# Altium PCB simple_bezel.PcbDoc
Units mm, origin at the board's own origin, x right, y up, seen from the top; angles counter-clockwise.
Board outline 100 x 100 mm, 2 copper layers (Top Layer, Bottom Layer); 5 components, 1 nets, 4 pads, 0 vias.
Unrouted connection lines stored in the file: 31.
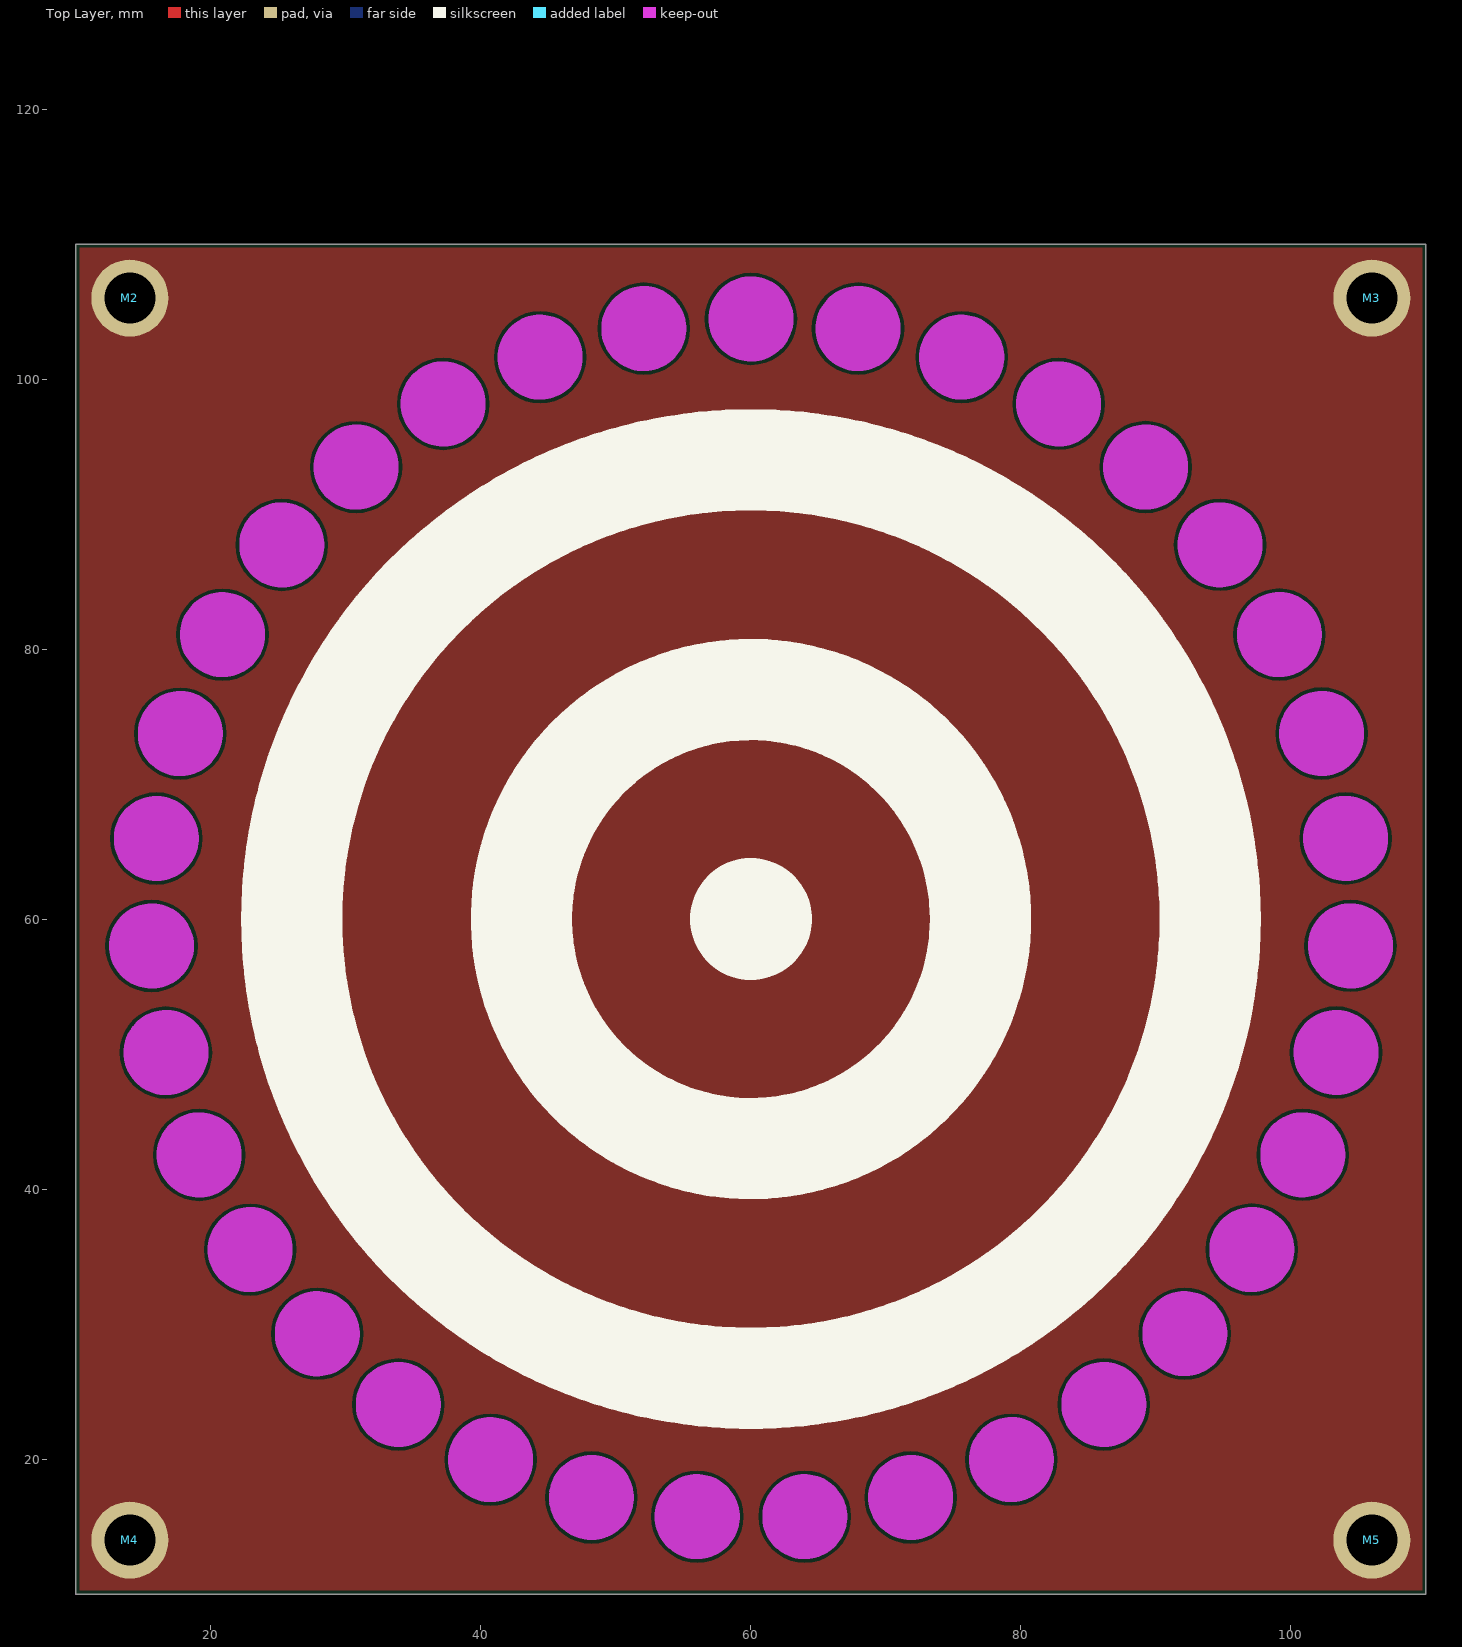
[diagram p0: Top Layer view]
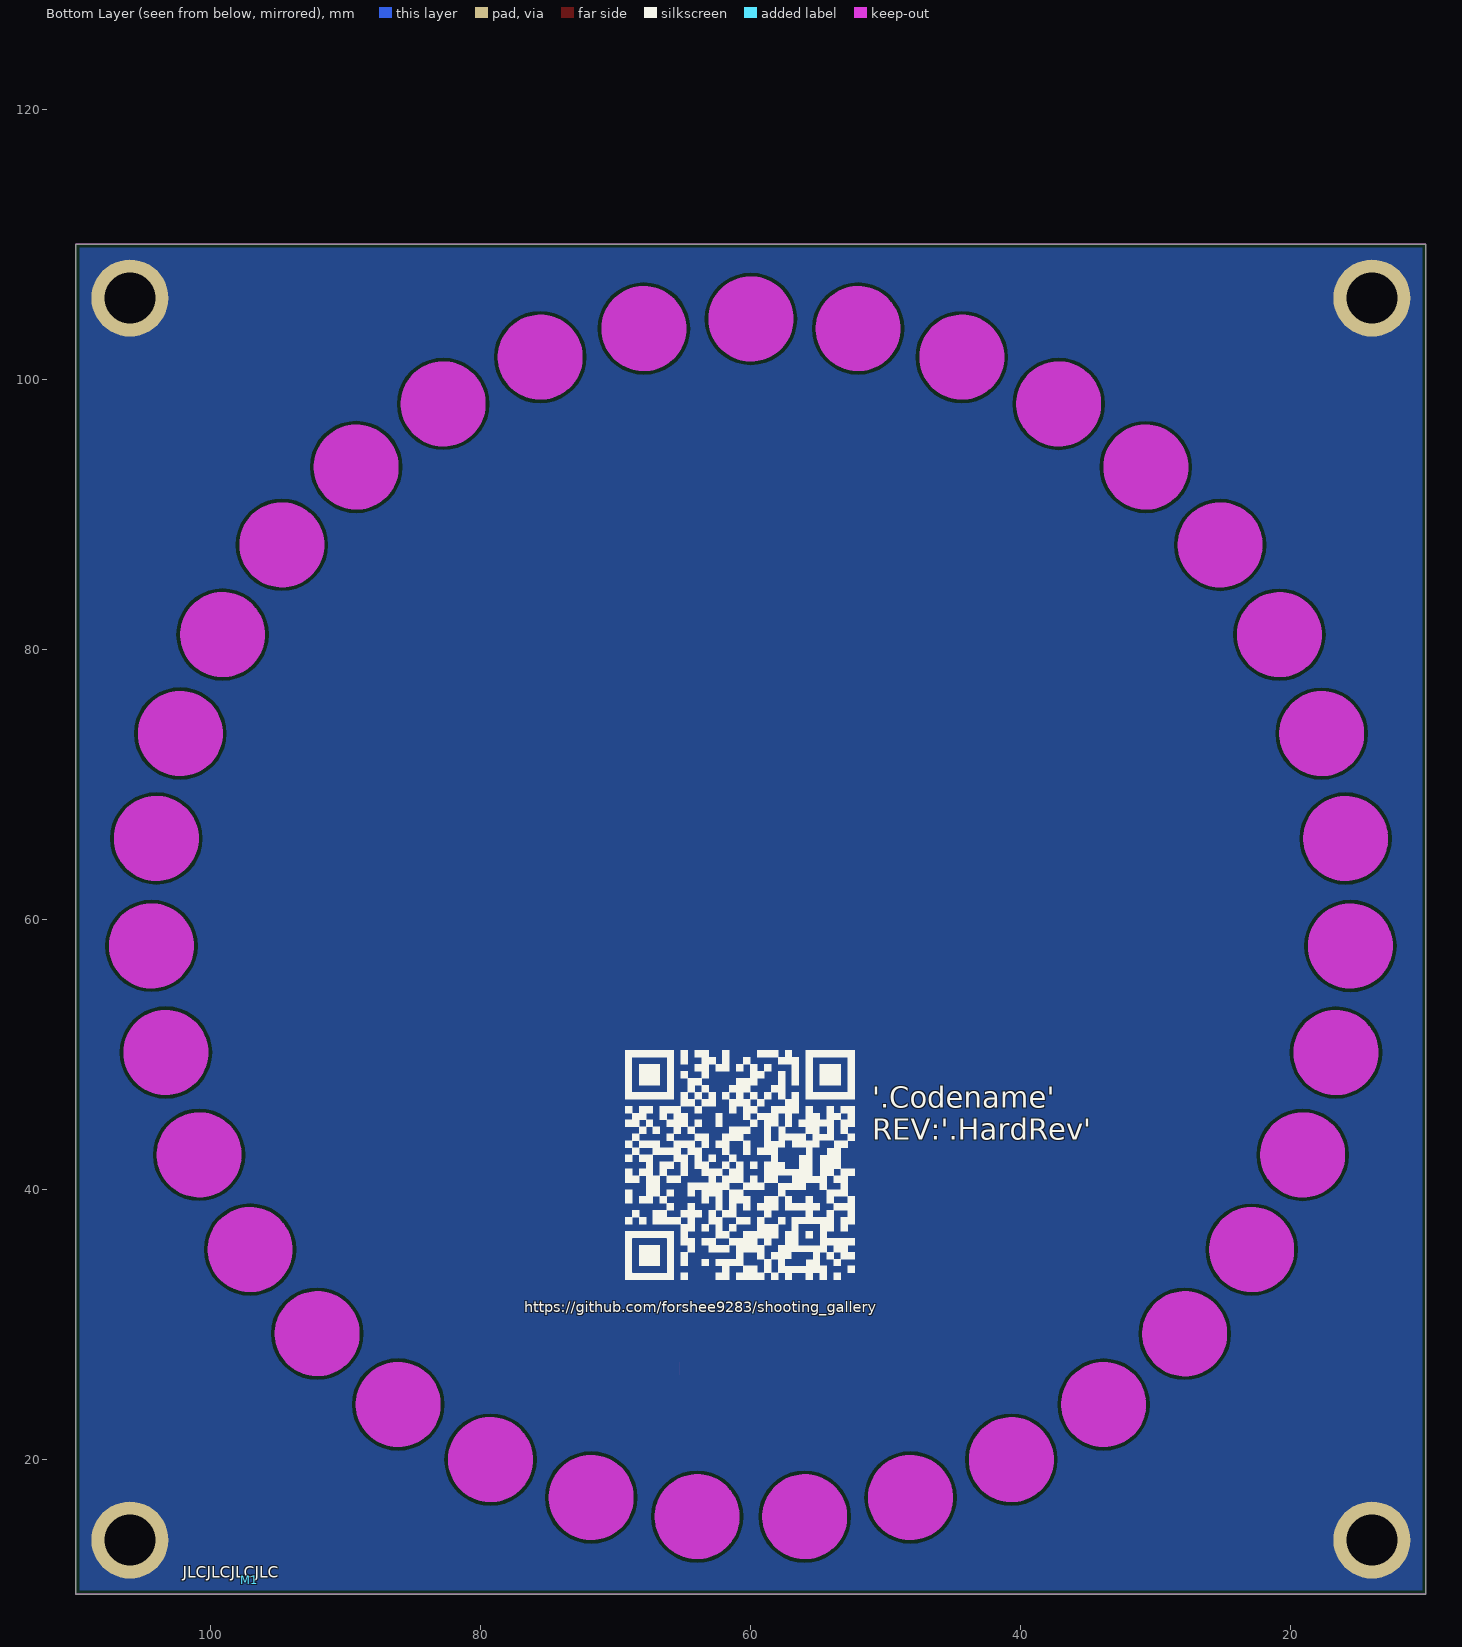
[diagram p1: Bottom Layer view, seen from below]

## Layer stack, top to bottom
Top Solder: solder mask 0.0102, Solder Resist, Dk 3.5
Top Layer: signal copper 0.0356
Dielectric 1: dielectric 0.32, FR-4, Dk 4.8
Bottom Layer: signal copper 0.0356
Bottom Solder: solder mask 0.0102, Solder Resist, Dk 3.5

## Board outline
10,10 110,10 110,110 10,110

## Design rules (kind name [scope] priority, off if disabled: settings)
Clearance Clearance_Poly_Keepout [InPolygon vs IsKeepOut] p1: gap=0.254 ignorepadtopadclearanceinfootprint=FALSE
Clearance Clearance_Poly [InPolygon] p2: gap=0.635 ignorepadtopadclearanceinfootprint=FALSE
Clearance [All] p3: gap=0.254 ignorepadtopadclearanceinfootprint=FALSE
HoleSize [All] p1: absolutevalues=TRUE maxlimit=2539.975 minlimit=0.025 maxpercent=80.000 minpercent=20.000
MinimumSolderMaskSliver [All] p1: minsoldermaskwidth=0.051
PolygonConnect PolygonConnect_Mount [IsPad and (InComponent('M2') or InComponent('M3') or InComponent('M4') or InComponent('M5'))] p1: connectstyle=Direct reliefconductorwidth=0.254 reliefentries=4 polygonreliefangle="90 Angle" airgapwidth=0.254
PolygonConnect [All] p2: thpad.connectstyle=Relief thpad.reliefconductorwidth=0.254 thpad.reliefentries=4 thpad.polygonreliefangle="90 Angle" thpad.airgapwidth=0.254 smdpad.connectstyle=Relief smdpad.reliefconductorwidth=0.254 smdpad.reliefentries=4 smdpad.polygonreliefangle="90 Angle" smdpad.airgapwidth=0.254 via.connectstyle=Direct via.reliefconductorwidth=0.254 via.reliefentries=4 via.polygonreliefangle="90 Angle" via.airgapwidth=0.254
RoutingVias [All] p1: holewidth=0.711 width=1.27 viastyle="Through Hole" minholewidth=0.711 minwidth=1.27 maxholewidth=0.711 maxwidth=1.27
SilkToSilkClearance [All] p1: silktosilkclearance=0
SilkToSolderMaskClearance [IsPad] p1: minsilkscreentomaskgap=0.025 clearancetoexposedcopper=TRUE
SolderMaskExpansion [All] p1: expansion=0.051 istentingtop=FALSE
SupplyNets "Schematic Supply Nets" [InNet('GND')] p1: voltage=0.000
Width [All] p1: maxlimit=253.975 minlimit=0.254 preferedwidth=0.254
26 further rules are at their usual default settings.

## Components (designator, comment, footprint, x,y, rotation, side; value= is the part's Value field where it differs from the comment)
M1 "JLC_NUMBER" JLC_NUMBER 97.122,11.016 r180 bottom
M2 "M3_HOLE" M3_HOLE 14,106 r0 top
M3 "M3_HOLE" M3_HOLE 106,106 r0 top
M4 "M3_HOLE" M3_HOLE 14,14 r0 top
M5 "M3_HOLE" M3_HOLE 106,14 r0 top

## Footprints (in the part's own frame and the unit in brackets; to place one, negate y for a bottom-side part, rotate by r counter-clockwise, add the part's x,y. Pads: shape width x height; smd on the part's side, far side on the other; paste and mask are expansions set on the pad)
JLC_NUMBER [mm]
M3_HOLE [mm]
  round 5.715 hole 3.75: 1(0,0)

## Part data
M1: "JLC Order Number Location", Manufacturer Part Number=JLC_NUMBER, PartNumber=JLC_NUMBER
M2 M3 M4 M5: Manufacturer Part Number=M3_HOLE, PartNumber=M3_HOLE

## Nets (pads, with @x,y where several pads share a name; then routed paths per layer and width w, separated by ;. In a path a pad name is that pad's centre, name@x,y a point inside that pad or via, vN(x,y) a via of type N, cw(c..) or ccw(c..) an arc to the next point about the centre after c; other vN are vias at no path point)
GND: M2.1 M3.1 M4.1 M5.1

## Polygon pours and split planes (outlines as drawn)
GND on Top Layer "GND_L01_P000" (solid, pour order 0): 110,10 10,10 10,110 110,110
GND on Bottom Layer "GND_L02_P001" (solid, pour order 1): 110,10 10,10 10,110 110,110

## Keep-outs
Top Layer:
  circle w4: c60,104.45 r1.15
  circle w4: c67.929,103.737 r1.15
  circle w4: c75.612,101.618 r1.15
  circle w4: c82.792,98.162 r1.15
  circle w4: c89.24,93.479 r1.15
  circle w4: c94.748,87.719 r1.15
  circle w4: c99.139,81.069 r1.15
  circle w4: c102.273,73.742 r1.15
  circle w4: c104.047,65.973 r1.15
  circle w4: c104.405,58.012 r1.15
  circle w4: c103.337,50.114 r1.15
  circle w4: c100.875,42.535 r1.15
  circle w4: c97.1,35.517 r1.15
  circle w4: c92.132,29.286 r1.15
  circle w4: c86.131,24.042 r1.15
  circle w4: c79.29,19.954 r1.15
  circle w4: c71.829,17.153 r1.15
  circle w4: c63.988,15.729 r1.15
  circle w4: c56.019,15.729 r1.15
  circle w4: c48.178,17.151 r1.15
  circle w4: c40.717,19.95 r1.15
  circle w4: c33.875,24.037 r1.15
  circle w4: c27.874,29.28 r1.15
  circle w4: c22.905,35.51 r1.15
  circle w4: c19.128,42.528 r1.15
  circle w4: c16.665,50.107 r1.15
  circle w4: c15.595,58.004 r1.15
  circle w4: c15.952,65.965 r1.15
  circle w4: c17.725,73.734 r1.15
  circle w4: c20.857,81.062 r1.15
  circle w4: c25.247,87.713 r1.15
  circle w4: c30.754,93.473 r1.15
  circle w4: c37.201,98.158 r1.15
  circle w4: c44.381,101.615 r1.15
  circle w4: c52.063,103.736 r1.15
Bottom Layer:
  circle w4: c52.063,103.736 r1.15
  circle w4: c44.381,101.615 r1.15
  circle w4: c37.201,98.158 r1.15
  circle w4: c30.754,93.473 r1.15
  circle w4: c25.247,87.713 r1.15
  circle w4: c20.857,81.062 r1.15
  circle w4: c17.725,73.734 r1.15
  circle w4: c15.952,65.965 r1.15
  circle w4: c15.595,58.004 r1.15
  circle w4: c16.665,50.107 r1.15
  circle w4: c19.128,42.528 r1.15
  circle w4: c22.905,35.51 r1.15
  circle w4: c27.874,29.28 r1.15
  circle w4: c33.875,24.037 r1.15
  circle w4: c40.717,19.95 r1.15
  circle w4: c48.178,17.151 r1.15
  circle w4: c56.019,15.729 r1.15
  circle w4: c63.988,15.729 r1.15
  circle w4: c71.829,17.153 r1.15
  circle w4: c79.29,19.954 r1.15
  circle w4: c86.131,24.042 r1.15
  circle w4: c92.132,29.286 r1.15
  circle w4: c97.1,35.517 r1.15
  circle w4: c100.875,42.535 r1.15
  circle w4: c103.337,50.114 r1.15
  circle w4: c104.405,58.012 r1.15
  circle w4: c104.047,65.973 r1.15
  circle w4: c102.273,73.742 r1.15
  circle w4: c99.139,81.069 r1.15
  circle w4: c94.748,87.719 r1.15
  circle w4: c89.24,93.479 r1.15
  circle w4: c82.792,98.162 r1.15
  circle w4: c75.612,101.618 r1.15
  circle w4: c67.929,103.737 r1.15
  circle w4: c60,104.45 r1.15
Keep-Out Layer:
  the board outline again, w0.05

## Silkscreen, mask and mechanical layers (free items; w line width, h text height)
Top Overlay:
  circle w7.5: c60,60 r0.762
  circle w7.5: c60,60 r17
  circle w7.5: c60,60 r34.015
Bottom Overlay:
  drawing of 90 lines, arcs and shapes, not listed
  text "'.Codename'  / REV:'.HardRev'" at 51.021,43.655 h1.57
  text "https://github.com/forshee9283/shooting_gallery" at 76.777,30.862 h0.79
Top Solder:
  circle w4.445: c67.929,103.737 r0.762
  circle w4.445: c75.612,101.618 r0.762
  circle w4.445: c82.792,98.162 r0.762
  circle w4.445: c89.24,93.479 r0.762
  circle w4.445: c94.748,87.719 r0.762
  circle w4.445: c99.139,81.069 r0.762
  circle w4.445: c102.273,73.742 r0.762
  circle w4.445: c104.047,65.973 r0.762
  circle w4.445: c104.405,58.012 r0.762
  circle w4.445: c103.337,50.114 r0.762
  circle w4.445: c100.875,42.535 r0.762
  circle w4.445: c97.1,35.517 r0.762
  circle w4.445: c92.132,29.286 r0.762
  circle w4.445: c86.131,24.042 r0.762
  circle w4.445: c79.29,19.954 r0.762
  circle w4.445: c71.829,17.153 r0.762
  circle w4.445: c63.988,15.729 r0.762
  circle w4.445: c56.019,15.729 r0.762
  circle w4.445: c48.178,17.151 r0.762
  circle w4.445: c40.717,19.95 r0.762
  circle w4.445: c33.875,24.037 r0.762
  circle w4.445: c27.874,29.28 r0.762
  circle w4.445: c22.905,35.51 r0.762
  circle w4.445: c19.128,42.528 r0.762
  circle w4.445: c16.665,50.107 r0.762
  circle w4.445: c15.595,58.004 r0.762
  circle w4.445: c15.952,65.965 r0.762
  circle w4.445: c17.725,73.734 r0.762
  circle w4.445: c20.857,81.062 r0.762
  circle w4.445: c25.247,87.713 r0.762
  circle w4.445: c30.754,93.473 r0.762
  circle w4.445: c37.201,98.158 r0.762
  circle w4.445: c44.381,101.615 r0.762
  circle w4.445: c52.063,103.736 r0.762
  circle w4.445: c60,104.45 r0.762
Bottom Solder:
  circle w4.445: c67.929,103.737 r0.762
  circle w4.445: c75.612,101.618 r0.762
  circle w4.445: c82.792,98.162 r0.762
  circle w4.445: c89.24,93.479 r0.762
  circle w4.445: c94.748,87.719 r0.762
  circle w4.445: c99.139,81.069 r0.762
  circle w4.445: c102.273,73.742 r0.762
  circle w4.445: c104.047,65.973 r0.762
  circle w4.445: c104.405,58.012 r0.762
  circle w4.445: c103.337,50.114 r0.762
  circle w4.445: c100.875,42.535 r0.762
  circle w4.445: c97.1,35.517 r0.762
  circle w4.445: c92.132,29.286 r0.762
  circle w4.445: c86.131,24.042 r0.762
  circle w4.445: c79.29,19.954 r0.762
  circle w4.445: c71.829,17.153 r0.762
  circle w4.445: c63.988,15.729 r0.762
  circle w4.445: c56.019,15.729 r0.762
  circle w4.445: c48.178,17.151 r0.762
  circle w4.445: c40.717,19.95 r0.762
  circle w4.445: c33.875,24.037 r0.762
  circle w4.445: c27.874,29.28 r0.762
  circle w4.445: c22.905,35.51 r0.762
  circle w4.445: c19.128,42.528 r0.762
  circle w4.445: c16.665,50.107 r0.762
  circle w4.445: c15.595,58.004 r0.762
  circle w4.445: c15.952,65.965 r0.762
  circle w4.445: c17.725,73.734 r0.762
  circle w4.445: c20.857,81.062 r0.762
  circle w4.445: c25.247,87.713 r0.762
  circle w4.445: c30.754,93.473 r0.762
  circle w4.445: c37.201,98.158 r0.762
  circle w4.445: c44.381,101.615 r0.762
  circle w4.445: c52.063,103.736 r0.762
  circle w4.445: c60,104.45 r0.762
  text "é" at 83.975,48.75 h50
Mechanical 1:
  the board outline again, w0.05

## Text inside footprints (layer, text, board x,y; h text height)
M1: Bottom Overlay "JLCJLCJLCJLC" at 102.079,11.216 h0.85